# Altium PCB GSH_3dprint_Bed12V_final.PcbDoc (part 1 of 2)
Units mm, origin at the board's own origin, x right, y up, seen from the top; angles counter-clockwise.
Board outline 125 x 120 mm, 2 copper layers (Top Layer, Bottom Layer); 5 components, 3 nets, 10 pads, 0 vias.
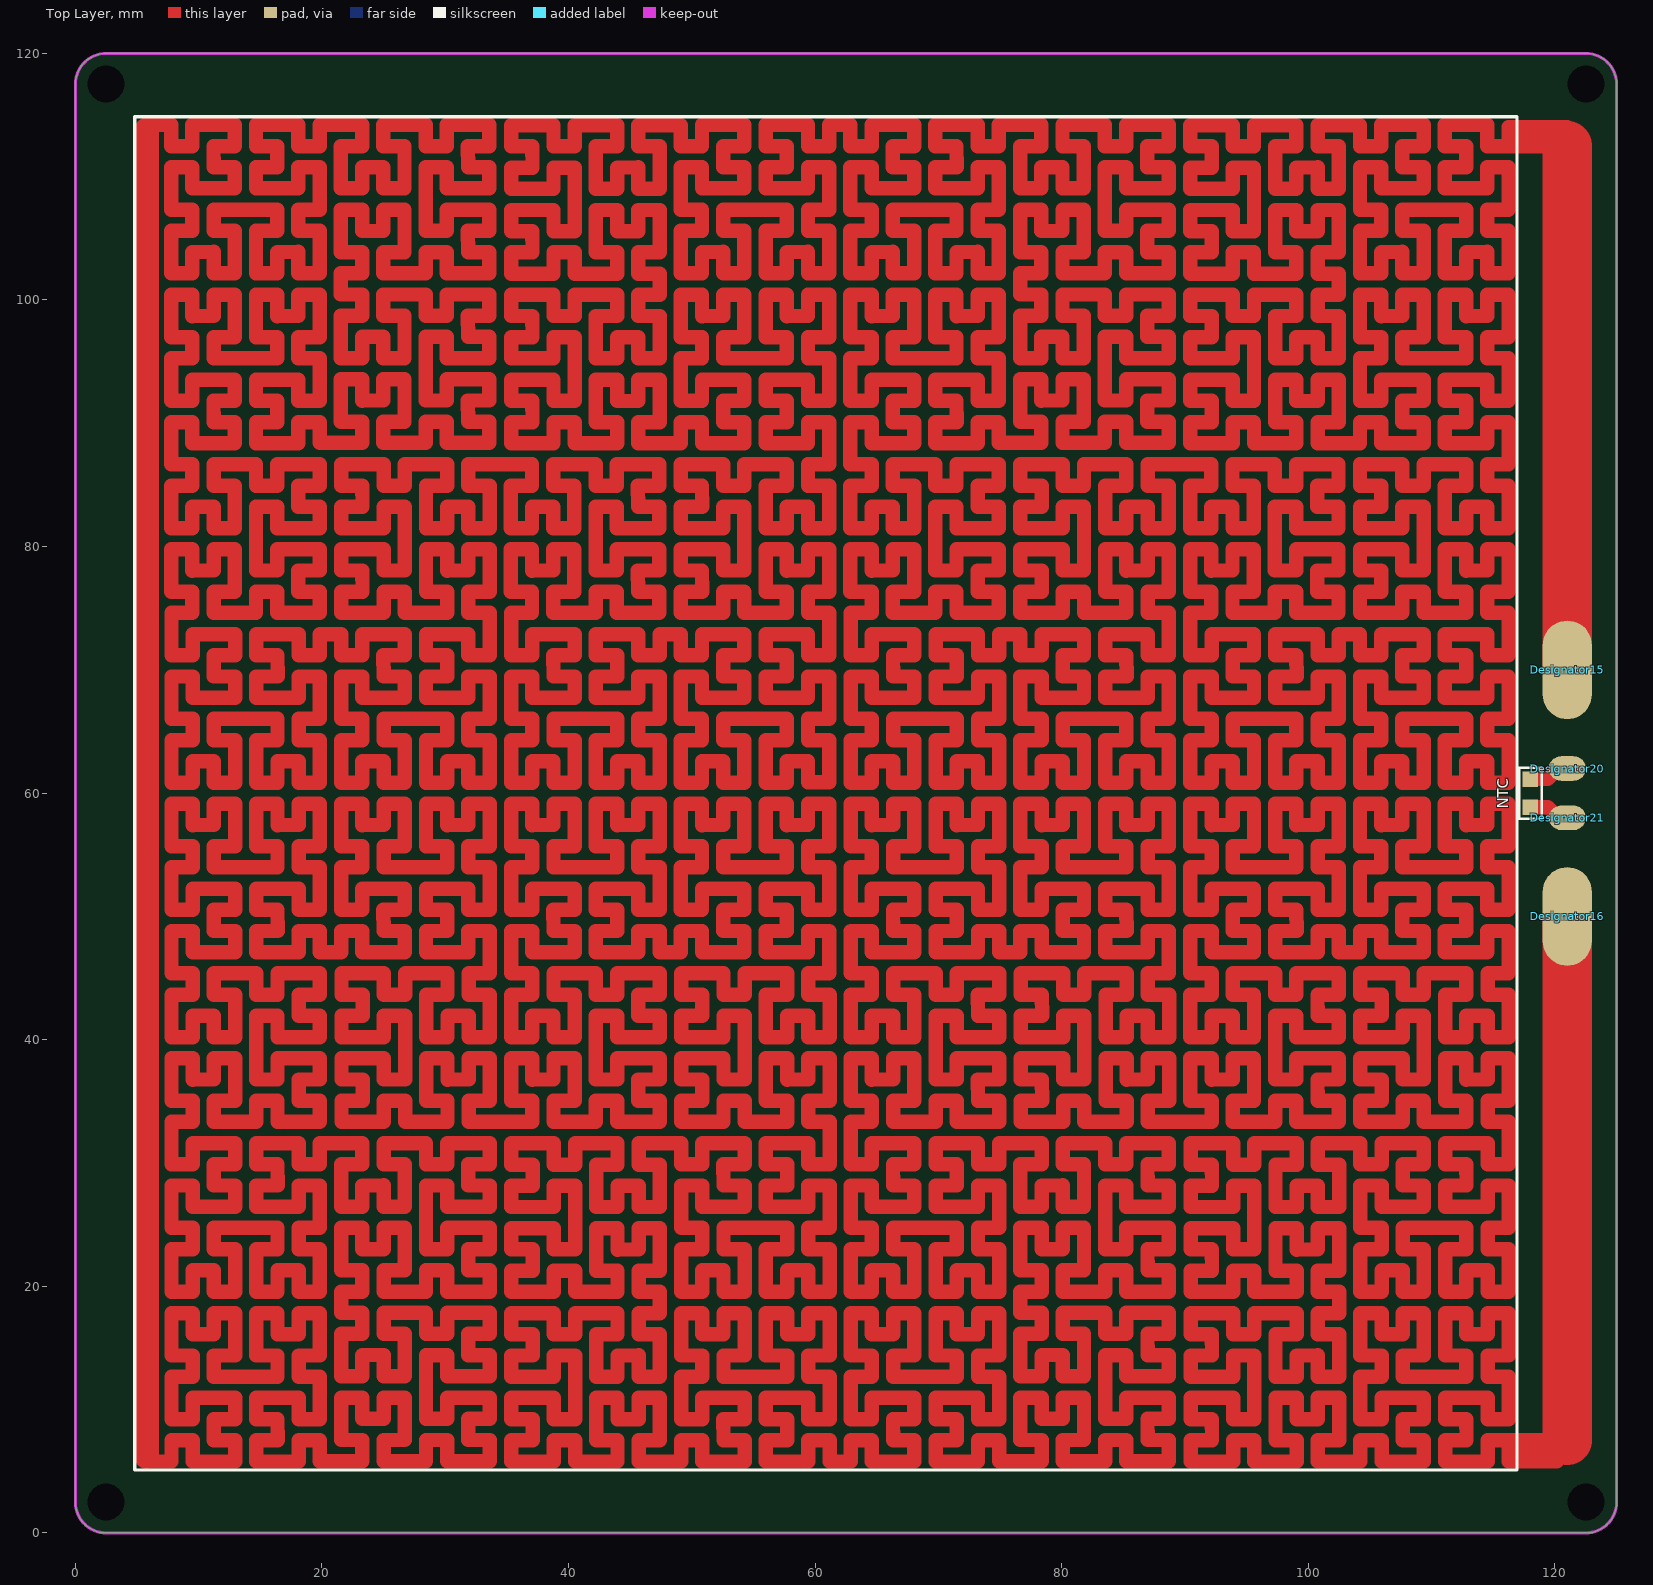
[diagram p0: Top Layer view]
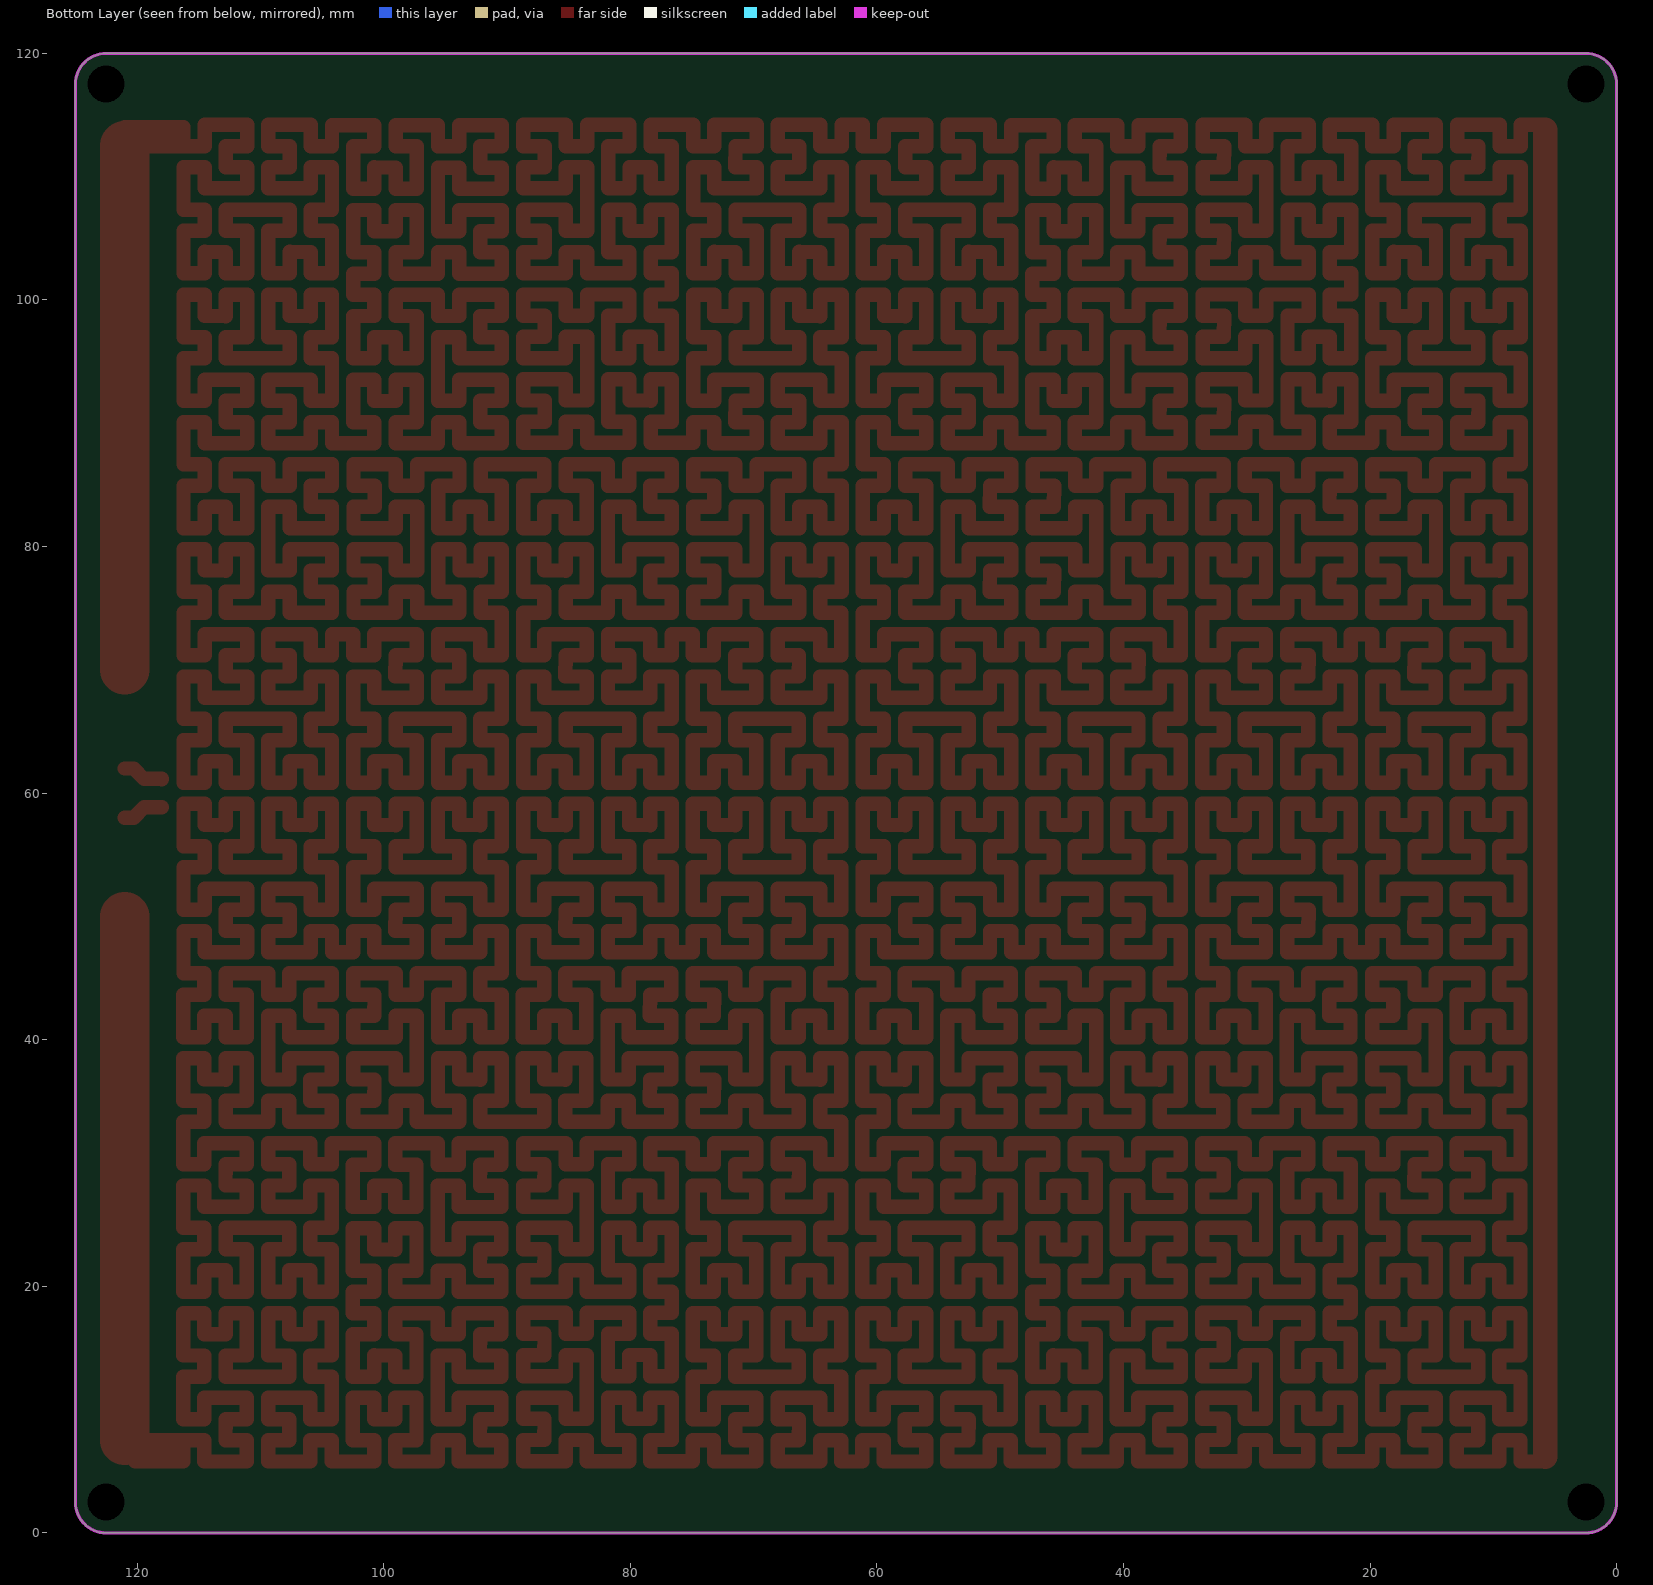
[diagram p1: Bottom Layer view, seen from below]

## Layer stack, top to bottom
Top Solder: solder mask 0.0102, Solder Resist, Dk 3.5
Top Layer: signal copper 0.0356
Dielectric 1: dielectric 0.32, FR-4, Dk 4.8
Bottom Layer: signal copper 0.0356
Bottom Solder: solder mask 0.0102, Solder Resist, Dk 3.5

## Board outline
0,2.5 0,117.5 cw(c2.5,117.5) 2.5,120 122.5,120 cw(c122.5,117.5) 125,117.5 125,2.5 cw(c122.5,2.5) 122.5,0 2.5,0 cw(c2.5,2.5)

## Design rules (kind name [scope] priority, off if disabled: settings)
Clearance [All] p1: gap=0 ignorepadtopadclearanceinfootprint=TRUE
PolygonConnect [All] p1: connectstyle=Relief reliefconductorwidth=0.254 reliefentries=4 polygonreliefangle="90 Angle" airgapwidth=0.254
RoutingVias [All] p1: holewidth=0.711 width=1.27 viastyle="Through Hole" minholewidth=0.711 minwidth=1.27 maxholewidth=0.711 maxwidth=1.27
SolderMaskExpansion [All] p1: expansion=0.102 istentingtop=FALSE
Width [All] p1: maxlimit=5 minlimit=0.254 preferedwidth=1.37 minimp=50.000000 maximp=50.000000 favimp=50.000000
30 further rules are at their usual default settings.

## Components (designator, comment, footprint, x,y, rotation, side; value= is the part's Value field where it differs from the comment)
Designator15 "Comment" "TEST 1.8"#1 121.768,63.348 r0 top
Designator16 "Comment" "TEST 1.8"#2 121.768,53.924 r0 top
Designator20 "Comment" "TEST 1.8"#3 128.778,59.969 r90 top
Designator21 "Comment" "TEST 1.8"#4 128.956,54.889 r90 top
NTC "Comment" "R 0805" 118,60 r90 top

## Footprints (in the part's own frame and the unit in brackets; to place one, negate y for a bottom-side part, rotate by r counter-clockwise, add the part's x,y. Pads: shape width x height; smd on the part's side, far side on the other; paste and mask are expansions set on the pad)
"R 0805" [mil] "1/8W贴片电阻"
  rect 50x50 smd: 1(-45,0) 2(45,0)
  silkscreen extent -81,-36 81,36, body extent -39,-25 39,25, height 20
"TEST 1.8"#1 [mm] "测试点1.8mm"
  oval 4x8 smd: 1(-0.768,6.652)
"TEST 1.8"#2 [mm] "测试点1.8mm"
  oval 4x8 smd: 1(-0.768,-3.924)
"TEST 1.8"#3 [mm] "测试点1.8mm"
  oval 2x3 smd: 1(2.031,7.778)
"TEST 1.8"#4 [mm] "测试点1.8mm"
  oval 2x3 smd: 1(3.111,7.956)

## Free pads (board coordinates)
  round 1.524 hole 3 unplated: 10(2.5,2.5) 10(2.5,117.5) 10(122.5,2.5) 10(122.5,117.5)